# EAGLE board Motor Duty Cycles (EAGLE 7.6.0)

Size 73.58 x 63.39 mm. Coordinates in mm from the lower left corner, seen from the top.
Outline: 0,0 56.82,0 56.82,53.33 0,53.33 0,0
Copper layers (1*16): Top 0.035mm / dielectric 1.5mm / Bottom 0.035mm
Design rules "default": minimum track width 10mil, minimum drill 24mil, track to track 8mil, track to pad 8mil, pad to pad 8mil, via to via 8mil, smd to smd 8mil, copper to edge 40mil, drill to drill 8mil, minimum pad ring 10mil, minimum via ring 8mil, stop-mask expansion 4mil, vias tented up to drill 0mil, thermal gap 10mil

## Footprints (pad centres in the part's own frame; a part is rotated, then mirrored left to right if it is on the bottom)
2P-2.54-65/35MIL = drill 0.889 pad 1.651 square: 1 0,1.27 | drill 0.889 pad 1.651: 2 0,-1.27
0207/10 = drill 0.813 octagon: 1 -5.08,0; 2 5.08,0
DIP04YL = drill 0.813 long: 1 -3.81,-3.81; 2 -1.27,-3.81; 3 1.27,-3.81; 4 3.81,-3.81; 5 3.81,3.81; 6 1.27,3.81; 7 -1.27,3.81; 8 -3.81,3.81
ARDUINO_UNO = drill 1.016 pad 1.88: 0 63.5,50.8; 1 60.96,50.8; 2 58.42,50.8; 3 55.88,50.8; 3.3V 35.56,2.54; 4 53.34,50.8; 5 50.8,50.8; 5V 38.1,2.54; 6 48.26,50.8; 7 45.72,50.8; 8 41.656,50.8; 9 39.116,50.8; 10 36.576,50.8; 11 34.036,50.8; 12 31.496,50.8; 13 28.956,50.8; A0 50.8,2.54; A1 53.34,2.54; A2 55.88,2.54; A3 58.42,2.54; A4 60.96,2.54; A5 63.5,2.54; AREF 23.876,50.8; GND 26.416,50.8; GND. 43.18,2.54; GND.. 40.64,2.54; I/OREF 30.48,2.54; N/C 27.94,2.54; RESET 33.02,2.54; SCL 18.796,50.8; SDA 21.336,50.8; VIN 45.72,2.54 | hole 3.2: 66.04,7.62; 66.04,35.56; 15.24,50.8; 13.97,2.54
DC-POWER = drill 0.889 pad 2.54 octagon: + 0,2.54; - 0,-2.54

## Placement (x,y rotation side)
M1  [2P-2.54-65/35MIL]  5,35.48 0 top
R1  330‎Ω  [0207/10]  5,60.88 0 top
R2  330‎Ω  [0207/10]  5,73.58 0 top  (outside the outline)
R3  330‎Ω  [0207/10]  5,86.28 0 top  (outside the outline)
R4  330‎Ω  [0207/10]  5,98.98 0 top  (outside the outline)
SW1  [DIP04YL]  5,22.78 0 top
U1  [ARDUINO_UNO]  5,10.08 0 top
U2  [DC-POWER]  5,48.18 0 top

## Library data of the parts
M1 R1-R4 SW1 U1 U2 = AUTODESK_CIRCUITS_BREADBOARD

## Nets
N$1: R3.2 SW1.3 U1.5
N$2: R4.2 SW1.4 U1.4
N$3: R1.2 SW1.1 U1.7
N$4: R2.2 SW1.2 U1.6
N$5: M1.2 U1.3 U2.+
N$6: M1.1 U1.GND U2.-
N$7: SW1.5 SW1.6 SW1.7 SW1.8 U1.5V
N$8: R1.1 R2.1 R3.1 R4.1 U1.GND..

## Tracks (layer width: path | path; a pad name or v marks a point on that pad's centre or on a via)
N$1  (2 unrouted)
N$2  (2 unrouted)
N$3  (2 unrouted)
N$4  (2 unrouted)
N$5  (2 unrouted)
N$6  (2 unrouted)
N$7  (4 unrouted)
N$8  (4 unrouted)